# Altium PCB PadaukPMS171BTestBoard.PcbDoc
Units mm, origin at the board's own origin, x right, y up, seen from the top; angles counter-clockwise.
Board outline 48.82 x 15.09 mm, 2 copper layers (Top Layer, Bottom Layer); 16 components, 13 nets, 50 pads, 0 vias.
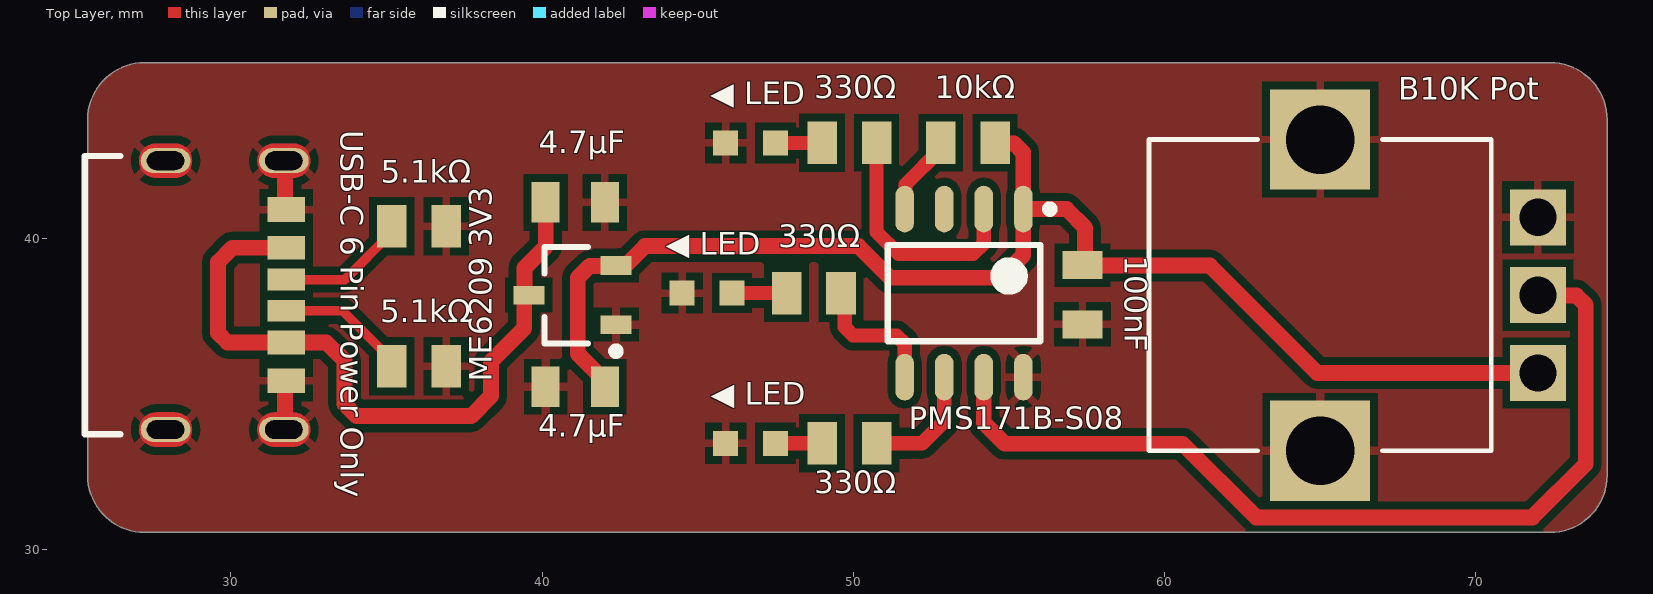
[diagram p0: Top Layer view]
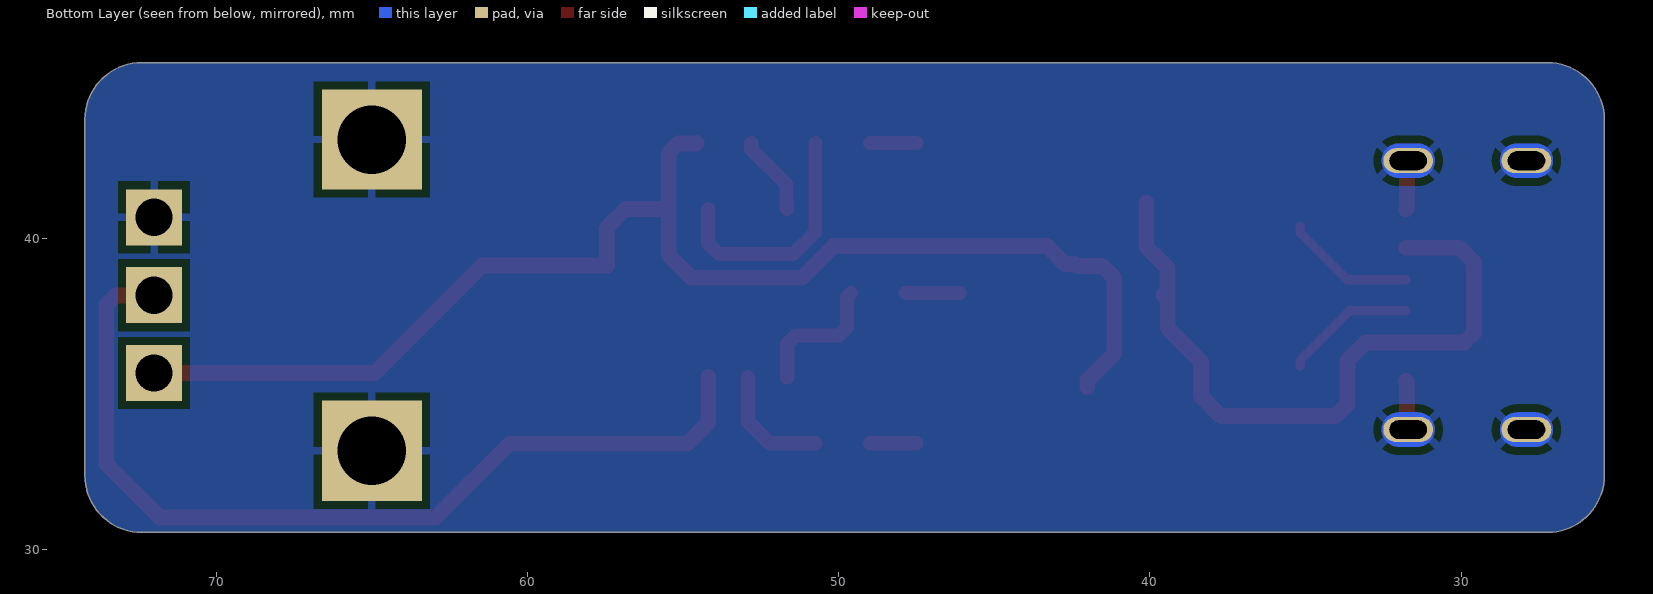
[diagram p1: Bottom Layer view, seen from below]
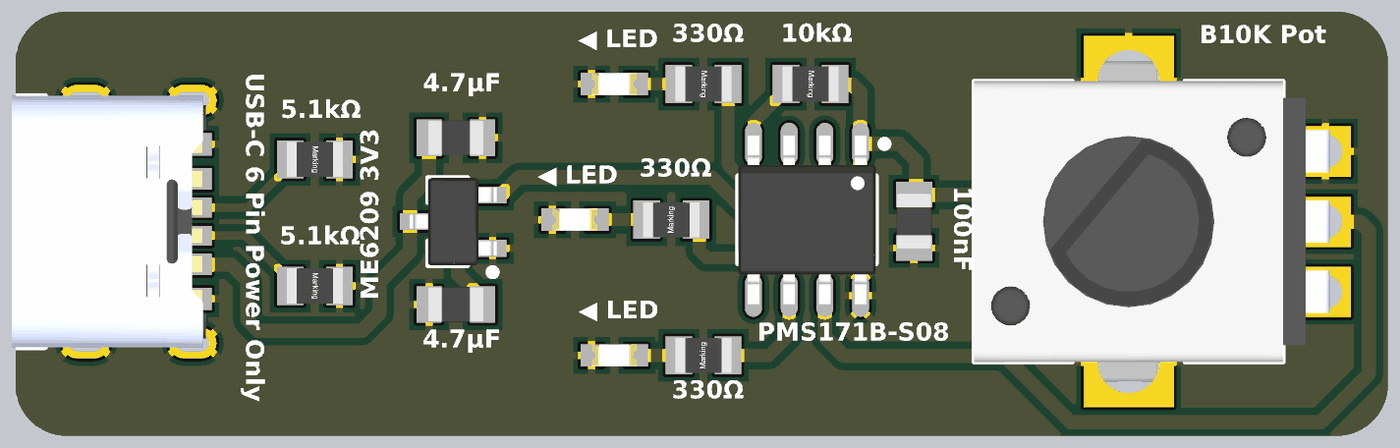
[diagram p2: 3D render of the assembled board from above, using the file's embedded part models]

## Layer stack, top to bottom
Top Solder: solder mask 0.0102, Solder Resist, Dk 3.5
Top Layer: signal copper 0.0356
Dielectric 1: dielectric 0.32, FR-4, Dk 4.8
Bottom Layer: signal copper 0.0356
Bottom Solder: solder mask 0.0102, Solder Resist, Dk 3.5

## Board outline
27.232,30.553 cw(c27.232,32.385) 25.4,32.385 25.4,43.815 cw(c27.232,43.815) 27.232,45.647 72.39,45.647 cw(c72.39,43.815) 74.222,43.815 74.222,32.385 cw(c72.39,32.385) 72.39,30.553

## Design rules (kind name [scope] priority, off if disabled: settings)
Clearance [All] p1: gap=0.254 ignorepadtopadclearanceinfootprint=FALSE
Height [All] p1: minheight=0 maxheight=50.8 prefheight=12.7
PolygonConnect [All] p1: connectstyle=Relief reliefconductorwidth=0.254 reliefentries=4 polygonreliefangle="90 Angle" conductorbypadedge=TRUE mindistance=0.381 enablemindistance=FALSE airgapwidth=0.254
RoutingVias [All] p1: holewidth=0.25 width=0.4 viastyle="Through Hole" minholewidth=0.25 minwidth=0.4 maxholewidth=0.25 maxwidth=0.4
SolderMaskExpansion [All] p1: expansion=0.102 istentingtop=FALSE
SupplyNets "Schematic Supply Nets_2" [InNet('3V3')] p1: voltage=0.000
SupplyNets "Schematic Supply Nets_1" [InNet('5V')] p2: voltage=0.000
SupplyNets "Schematic Supply Nets" [InNet('GND')] p3: voltage=0.000
Width [All] p1: maxlimit=0.508 minlimit=0.102 preferedwidth=0.305
29 further rules are at their usual default settings.

## Classes and differential pairs
component class PadaukPMS171BTestBoard: 4.7µF 5.1kΩ 10kΩ 100nF 330Ω "B10K Pot" "ME6209 3V3" PMS171B-S08 "USB-C 6 Pin Power Only" "◀ LED"

## Components (designator, comment, footprint, x,y, rotation, side; value= is the part's Value field where it differs from the comment)
4.7µF "4.7uF" WCAP-CSGP_0805_H=0.8mm_Reflow 41.065,35.229 r0 top (schematic designator C3)
4.7µF "4.7uF" WCAP-CSGP_0805_H=0.8mm_Reflow 41.065,41.157 r180 top (schematic designator C2)
5.1kΩ "5.1k" WRIS-PSMB_0805_H=0.22mm 36.046,40.389 r180 top (schematic designator R1)
5.1kΩ "5.1k" WRIS-PSMB_0805_H=0.22mm 36.046,35.888 r180 top (schematic designator R2)
10kΩ "10k" WRIS-PSMB_0805_H=0.22mm 53.683,43.068 r180 top (schematic designator R6)
100nF "100nF" WCAP-CSGP_0805_H=0.8mm_Reflow 57.364,38.189 r90 top (schematic designator C1)
330Ω "330Ω" WRIS-PSMB_0805_H=0.22mm 48.73,38.242 r0 top (schematic designator R5)
330Ω "330Ω" WRIS-PSMB_0805_H=0.22mm 49.873,33.416 r0 top (schematic designator R4)
330Ω "330Ω" WRIS-PSMB_0805_H=0.22mm 49.873,43.068 r180 top (schematic designator R3)
"B10K Pot" "RV09AF-40-20K-A10K" PTV09A-4025F-B103 64.998,38.177 r90 top (schematic designator P1)
"ME6209 3V3" "ME6209" SOT95P285X150-3N 40.973,38.177 r180 top (schematic designator U2)
PMS171B-S08 "PMS171B-S08" PMS171B-S08 53.556,38.242 r270 top (schematic designator U1)
"USB-C 6 Pin Power Only" "USB 6Pin Female Power Only" GCT_USB4125-GF-A_REVA2 28.702,38.177 r270 top (schematic designator J1)
"◀ LED" "Yellow, 2V" WL-SMCW_0603_H=0.7mm 45.301,38.242 r0 top (schematic designator D2)
"◀ LED" "Yellow, 2V" WL-SMCW_0603_H=0.7mm 46.698,33.416 r0 top (schematic designator D1)
"◀ LED" "Yellow, 2V" WL-SMCW_0603_H=0.7mm 46.698,43.068 r0 top (schematic designator D3)

## Footprints (in the part's own frame and the unit in brackets; to place one, negate y for a bottom-side part, rotate by r counter-clockwise, add the part's x,y. Pads: shape width x height; smd on the part's side, far side on the other; paste and mask are expansions set on the pad)
GCT_USB4125-GF-A_REVA2 [mm]
  rect 0.7x1.2 smd: A5(-0.5,3.08) B5(0.5,3.08)
  rect 0.76x1.2 smd: A9(1.52,3.08) B9(-1.52,3.08)
  rect 0.8x1.2 smd: A12(2.75,3.08) B12(-2.75,3.08)
  oval 0.8x1.6 hole 0.6 slot 1.2 at 90 deg mask+0: S1(-4.32,3) S2(4.32,3) S3(-4.32,-0.8) S4(4.32,-0.8)
  Top Layer region: 4.349,3.849 4.377,3.847 4.406,3.843 4.434,3.838 4.462,3.831 4.49,3.823 4.517,3.813 4.544,3.802 4.57,3.79 4.595,3.776 4.62,3.761 4.643,3.745 4.666,3.727 4.688,3.709 4.709,3.689 4.729,3.668 4.747,3.646 4.765,3.623 4.781,3.6 4.796,3.575 4.81,3.55 4.822,3.524 4.833,3.497 4.843,3.47 4.851,3.442 4.858,3.414 4.863,3.386 4.867,3.357 4.869,3.329 4.87,3.3 4.87,2.7 4.869,2.671 4.867,2.643 4.863,2.614 4.858,2.586 4.851,2.558 4.843,2.53 4.833,2.503 4.822,2.476 4.81,2.45 4.796,2.425 4.781,2.4 4.765,2.377 4.747,2.354 4.729,2.332 4.709,2.311 4.688,2.291 4.666,2.273 4.643,2.255 4.62,2.239 4.595,2.224 4.57,2.21 4.544,2.198 4.517,2.187 4.49,2.177 4.462,2.169 4.434,2.162 4.406,2.157 4.377,2.153 4.349,2.151 4.32,2.15 4.291,2.151 4.263,2.153 4.234,2.157 4.206,2.162 4.178,2.169 4.15,2.177 4.123,2.187 4.096,2.198 4.07,2.21 4.045,2.224 4.02,2.239 3.997,2.255 3.974,2.273 3.952,2.291 3.931,2.311 3.911,2.332 3.893,2.354 3.875,2.377 3.859,2.4 3.844,2.425 3.83,2.45 3.818,2.476 3.807,2.503 3.797,2.53 3.789,2.558 3.782,2.586 3.777,2.614 3.773,2.643 3.771,2.671 3.77,2.7 3.77,3.3 3.771,3.329 3.773,3.357 3.777,3.386 3.782,3.414 3.789,3.442 3.797,3.47 3.807,3.497 3.818,3.524 3.83,3.55 3.844,3.575 3.859,3.6 3.875,3.623 3.893,3.646 3.911,3.668 3.931,3.689 3.952,3.709 3.974,3.727 3.997,3.745 4.02,3.761 4.045,3.776 4.07,3.79 4.096,3.802 4.123,3.813 4.15,3.823 4.178,3.831 4.206,3.838 4.234,3.843 4.263,3.847 4.291,3.849 4.32,3.85
  Top Layer region: -4.291,3.849 -4.263,3.847 -4.234,3.843 -4.206,3.838 -4.178,3.831 -4.15,3.823 -4.123,3.813 -4.096,3.802 -4.07,3.79 -4.045,3.776 -4.02,3.761 -3.997,3.745 -3.974,3.727 -3.952,3.709 -3.931,3.689 -3.911,3.668 -3.893,3.646 -3.875,3.623 -3.859,3.6 -3.844,3.575 -3.83,3.55 -3.818,3.524 -3.807,3.497 -3.797,3.47 -3.789,3.442 -3.782,3.414 -3.777,3.386 -3.773,3.357 -3.771,3.329 -3.77,3.3 -3.77,2.7 -3.771,2.671 -3.773,2.643 -3.777,2.614 -3.782,2.586 -3.789,2.558 -3.797,2.53 -3.807,2.503 -3.818,2.476 -3.83,2.45 -3.844,2.425 -3.859,2.4 -3.875,2.377 -3.893,2.354 -3.911,2.332 -3.931,2.311 -3.952,2.291 -3.974,2.273 -3.997,2.255 -4.02,2.239 -4.045,2.224 -4.07,2.21 -4.096,2.198 -4.123,2.187 -4.15,2.177 -4.178,2.169 -4.206,2.162 -4.234,2.157 -4.263,2.153 -4.291,2.151 -4.32,2.15 -4.349,2.151 -4.377,2.153 -4.406,2.157 -4.434,2.162 -4.462,2.169 -4.49,2.177 -4.517,2.187 -4.544,2.198 -4.57,2.21 -4.595,2.224 -4.62,2.239 -4.643,2.255 -4.666,2.273 -4.688,2.291 -4.709,2.311 -4.729,2.332 -4.747,2.354 -4.765,2.377 -4.781,2.4 -4.796,2.425 -4.81,2.45 -4.822,2.476 -4.833,2.503 -4.843,2.53 -4.851,2.558 -4.858,2.586 -4.863,2.614 -4.867,2.643 -4.869,2.671 -4.87,2.7 -4.87,3.3 -4.869,3.329 -4.867,3.357 -4.863,3.386 -4.858,3.414 -4.851,3.442 -4.843,3.47 -4.833,3.497 -4.822,3.524 -4.81,3.55 -4.796,3.575 -4.781,3.6 -4.765,3.623 -4.747,3.646 -4.729,3.668 -4.709,3.689 -4.688,3.709 -4.666,3.727 -4.643,3.745 -4.62,3.761 -4.595,3.776 -4.57,3.79 -4.544,3.802 -4.517,3.813 -4.49,3.823 -4.462,3.831 -4.434,3.838 -4.406,3.843 -4.377,3.847 -4.349,3.849 -4.32,3.85
  Top Layer region: 4.349,0.049 4.377,0.047 4.406,0.043 4.434,0.038 4.462,0.031 4.49,0.023 4.517,0.013 4.544,0.002 4.57,-0.01 4.595,-0.024 4.62,-0.039 4.643,-0.055 4.666,-0.073 4.688,-0.091 4.709,-0.111 4.729,-0.132 4.747,-0.154 4.765,-0.177 4.781,-0.2 4.796,-0.225 4.81,-0.25 4.822,-0.276 4.833,-0.303 4.843,-0.33 4.851,-0.358 4.858,-0.386 4.863,-0.414 4.867,-0.443 4.869,-0.471 4.87,-0.5 4.87,-1.1 4.869,-1.129 4.867,-1.157 4.863,-1.186 4.858,-1.214 4.851,-1.242 4.843,-1.27 4.833,-1.297 4.822,-1.324 4.81,-1.35 4.796,-1.375 4.781,-1.4 4.765,-1.423 4.747,-1.446 4.729,-1.468 4.709,-1.489 4.688,-1.509 4.666,-1.527 4.643,-1.545 4.62,-1.561 4.595,-1.576 4.57,-1.59 4.544,-1.602 4.517,-1.613 4.49,-1.623 4.462,-1.631 4.434,-1.638 4.406,-1.643 4.377,-1.647 4.349,-1.649 4.32,-1.65 4.291,-1.649 4.263,-1.647 4.234,-1.643 4.206,-1.638 4.178,-1.631 4.15,-1.623 4.123,-1.613 4.096,-1.602 4.07,-1.59 4.045,-1.576 4.02,-1.561 3.997,-1.545 3.974,-1.527 3.952,-1.509 3.931,-1.489 3.911,-1.468 3.893,-1.446 3.875,-1.423 3.859,-1.4 3.844,-1.375 3.83,-1.35 3.818,-1.324 3.807,-1.297 3.797,-1.27 3.789,-1.242 3.782,-1.214 3.777,-1.186 3.773,-1.157 3.771,-1.129 3.77,-1.1 3.77,-0.5 3.771,-0.471 3.773,-0.443 3.777,-0.414 3.782,-0.386 3.789,-0.358 3.797,-0.33 3.807,-0.303 3.818,-0.276 3.83,-0.25 3.844,-0.225 3.859,-0.2 3.875,-0.177 3.893,-0.154 3.911,-0.132 3.931,-0.111 3.952,-0.091 3.974,-0.073 3.997,-0.055 4.02,-0.039 4.045,-0.024 4.07,-0.01 4.096,0.002 4.123,0.013 4.15,0.023 4.178,0.031 4.206,0.038 4.234,0.043 4.263,0.047 4.291,0.049 4.32,0.05
  Top Layer region: -4.291,0.049 -4.263,0.047 -4.234,0.043 -4.206,0.038 -4.178,0.031 -4.15,0.023 -4.123,0.013 -4.096,0.002 -4.07,-0.01 -4.045,-0.024 -4.02,-0.039 -3.997,-0.055 -3.974,-0.073 -3.952,-0.091 -3.931,-0.111 -3.911,-0.132 -3.893,-0.154 -3.875,-0.177 -3.859,-0.2 -3.844,-0.225 -3.83,-0.25 -3.818,-0.276 -3.807,-0.303 -3.797,-0.33 -3.789,-0.358 -3.782,-0.386 -3.777,-0.414 -3.773,-0.443 -3.771,-0.471 -3.77,-0.5 -3.77,-1.1 -3.771,-1.129 -3.773,-1.157 -3.777,-1.186 -3.782,-1.214 -3.789,-1.242 -3.797,-1.27 -3.807,-1.297 -3.818,-1.324 -3.83,-1.35 -3.844,-1.375 -3.859,-1.4 -3.875,-1.423 -3.893,-1.446 -3.911,-1.468 -3.931,-1.489 -3.952,-1.509 -3.974,-1.527 -3.997,-1.545 -4.02,-1.561 -4.045,-1.576 -4.07,-1.59 -4.096,-1.602 -4.123,-1.613 -4.15,-1.623 -4.178,-1.631 -4.206,-1.638 -4.234,-1.643 -4.263,-1.647 -4.291,-1.649 -4.32,-1.65 -4.349,-1.649 -4.377,-1.647 -4.406,-1.643 -4.434,-1.638 -4.462,-1.631 -4.49,-1.623 -4.517,-1.613 -4.544,-1.602 -4.57,-1.59 -4.595,-1.576 -4.62,-1.561 -4.643,-1.545 -4.666,-1.527 -4.688,-1.509 -4.709,-1.489 -4.729,-1.468 -4.747,-1.446 -4.765,-1.423 -4.781,-1.4 -4.796,-1.375 -4.81,-1.35 -4.822,-1.324 -4.833,-1.297 -4.843,-1.27 -4.851,-1.242 -4.858,-1.214 -4.863,-1.186 -4.867,-1.157 -4.869,-1.129 -4.87,-1.1 -4.87,-0.5 -4.869,-0.471 -4.867,-0.443 -4.863,-0.414 -4.858,-0.386 -4.851,-0.358 -4.843,-0.33 -4.833,-0.303 -4.822,-0.276 -4.81,-0.25 -4.796,-0.225 -4.781,-0.2 -4.765,-0.177 -4.747,-0.154 -4.729,-0.132 -4.709,-0.111 -4.688,-0.091 -4.666,-0.073 -4.643,-0.055 -4.62,-0.039 -4.595,-0.024 -4.57,-0.01 -4.544,0.002 -4.517,0.013 -4.49,0.023 -4.462,0.031 -4.434,0.038 -4.406,0.043 -4.377,0.047 -4.349,0.049 -4.32,0.05
  Bottom Layer region: 4.349,3.849 4.377,3.847 4.406,3.843 4.434,3.838 4.462,3.831 4.49,3.823 4.517,3.813 4.544,3.802 4.57,3.79 4.595,3.776 4.62,3.761 4.643,3.745 4.666,3.727 4.688,3.709 4.709,3.689 4.729,3.668 4.747,3.646 4.765,3.623 4.781,3.6 4.796,3.575 4.81,3.55 4.822,3.524 4.833,3.497 4.843,3.47 4.851,3.442 4.858,3.414 4.863,3.386 4.867,3.357 4.869,3.329 4.87,3.3 4.87,2.7 4.869,2.671 4.867,2.643 4.863,2.614 4.858,2.586 4.851,2.558 4.843,2.53 4.833,2.503 4.822,2.476 4.81,2.45 4.796,2.425 4.781,2.4 4.765,2.377 4.747,2.354 4.729,2.332 4.709,2.311 4.688,2.291 4.666,2.273 4.643,2.255 4.62,2.239 4.595,2.224 4.57,2.21 4.544,2.198 4.517,2.187 4.49,2.177 4.462,2.169 4.434,2.162 4.406,2.157 4.377,2.153 4.349,2.151 4.32,2.15 4.291,2.151 4.263,2.153 4.234,2.157 4.206,2.162 4.178,2.169 4.15,2.177 4.123,2.187 4.096,2.198 4.07,2.21 4.045,2.224 4.02,2.239 3.997,2.255 3.974,2.273 3.952,2.291 3.931,2.311 3.911,2.332 3.893,2.354 3.875,2.377 3.859,2.4 3.844,2.425 3.83,2.45 3.818,2.476 3.807,2.503 3.797,2.53 3.789,2.558 3.782,2.586 3.777,2.614 3.773,2.643 3.771,2.671 3.77,2.7 3.77,3.3 3.771,3.329 3.773,3.357 3.777,3.386 3.782,3.414 3.789,3.442 3.797,3.47 3.807,3.497 3.818,3.524 3.83,3.55 3.844,3.575 3.859,3.6 3.875,3.623 3.893,3.646 3.911,3.668 3.931,3.689 3.952,3.709 3.974,3.727 3.997,3.745 4.02,3.761 4.045,3.776 4.07,3.79 4.096,3.802 4.123,3.813 4.15,3.823 4.178,3.831 4.206,3.838 4.234,3.843 4.263,3.847 4.291,3.849 4.32,3.85
  Bottom Layer region: -4.291,3.849 -4.263,3.847 -4.234,3.843 -4.206,3.838 -4.178,3.831 -4.15,3.823 -4.123,3.813 -4.096,3.802 -4.07,3.79 -4.045,3.776 -4.02,3.761 -3.997,3.745 -3.974,3.727 -3.952,3.709 -3.931,3.689 -3.911,3.668 -3.893,3.646 -3.875,3.623 -3.859,3.6 -3.844,3.575 -3.83,3.55 -3.818,3.524 -3.807,3.497 -3.797,3.47 -3.789,3.442 -3.782,3.414 -3.777,3.386 -3.773,3.357 -3.771,3.329 -3.77,3.3 -3.77,2.7 -3.771,2.671 -3.773,2.643 -3.777,2.614 -3.782,2.586 -3.789,2.558 -3.797,2.53 -3.807,2.503 -3.818,2.476 -3.83,2.45 -3.844,2.425 -3.859,2.4 -3.875,2.377 -3.893,2.354 -3.911,2.332 -3.931,2.311 -3.952,2.291 -3.974,2.273 -3.997,2.255 -4.02,2.239 -4.045,2.224 -4.07,2.21 -4.096,2.198 -4.123,2.187 -4.15,2.177 -4.178,2.169 -4.206,2.162 -4.234,2.157 -4.263,2.153 -4.291,2.151 -4.32,2.15 -4.349,2.151 -4.377,2.153 -4.406,2.157 -4.434,2.162 -4.462,2.169 -4.49,2.177 -4.517,2.187 -4.544,2.198 -4.57,2.21 -4.595,2.224 -4.62,2.239 -4.643,2.255 -4.666,2.273 -4.688,2.291 -4.709,2.311 -4.729,2.332 -4.747,2.354 -4.765,2.377 -4.781,2.4 -4.796,2.425 -4.81,2.45 -4.822,2.476 -4.833,2.503 -4.843,2.53 -4.851,2.558 -4.858,2.586 -4.863,2.614 -4.867,2.643 -4.869,2.671 -4.87,2.7 -4.87,3.3 -4.869,3.329 -4.867,3.357 -4.863,3.386 -4.858,3.414 -4.851,3.442 -4.843,3.47 -4.833,3.497 -4.822,3.524 -4.81,3.55 -4.796,3.575 -4.781,3.6 -4.765,3.623 -4.747,3.646 -4.729,3.668 -4.709,3.689 -4.688,3.709 -4.666,3.727 -4.643,3.745 -4.62,3.761 -4.595,3.776 -4.57,3.79 -4.544,3.802 -4.517,3.813 -4.49,3.823 -4.462,3.831 -4.434,3.838 -4.406,3.843 -4.377,3.847 -4.349,3.849 -4.32,3.85
  Bottom Layer region: 4.349,0.049 4.377,0.047 4.406,0.043 4.434,0.038 4.462,0.031 4.49,0.023 4.517,0.013 4.544,0.002 4.57,-0.01 4.595,-0.024 4.62,-0.039 4.643,-0.055 4.666,-0.073 4.688,-0.091 4.709,-0.111 4.729,-0.132 4.747,-0.154 4.765,-0.177 4.781,-0.2 4.796,-0.225 4.81,-0.25 4.822,-0.276 4.833,-0.303 4.843,-0.33 4.851,-0.358 4.858,-0.386 4.863,-0.414 4.867,-0.443 4.869,-0.471 4.87,-0.5 4.87,-1.1 4.869,-1.129 4.867,-1.157 4.863,-1.186 4.858,-1.214 4.851,-1.242 4.843,-1.27 4.833,-1.297 4.822,-1.324 4.81,-1.35 4.796,-1.375 4.781,-1.4 4.765,-1.423 4.747,-1.446 4.729,-1.468 4.709,-1.489 4.688,-1.509 4.666,-1.527 4.643,-1.545 4.62,-1.561 4.595,-1.576 4.57,-1.59 4.544,-1.602 4.517,-1.613 4.49,-1.623 4.462,-1.631 4.434,-1.638 4.406,-1.643 4.377,-1.647 4.349,-1.649 4.32,-1.65 4.291,-1.649 4.263,-1.647 4.234,-1.643 4.206,-1.638 4.178,-1.631 4.15,-1.623 4.123,-1.613 4.096,-1.602 4.07,-1.59 4.045,-1.576 4.02,-1.561 3.997,-1.545 3.974,-1.527 3.952,-1.509 3.931,-1.489 3.911,-1.468 3.893,-1.446 3.875,-1.423 3.859,-1.4 3.844,-1.375 3.83,-1.35 3.818,-1.324 3.807,-1.297 3.797,-1.27 3.789,-1.242 3.782,-1.214 3.777,-1.186 3.773,-1.157 3.771,-1.129 3.77,-1.1 3.77,-0.5 3.771,-0.471 3.773,-0.443 3.777,-0.414 3.782,-0.386 3.789,-0.358 3.797,-0.33 3.807,-0.303 3.818,-0.276 3.83,-0.25 3.844,-0.225 3.859,-0.2 3.875,-0.177 3.893,-0.154 3.911,-0.132 3.931,-0.111 3.952,-0.091 3.974,-0.073 3.997,-0.055 4.02,-0.039 4.045,-0.024 4.07,-0.01 4.096,0.002 4.123,0.013 4.15,0.023 4.178,0.031 4.206,0.038 4.234,0.043 4.263,0.047 4.291,0.049 4.32,0.05
  Bottom Layer region: -4.291,0.049 -4.263,0.047 -4.234,0.043 -4.206,0.038 -4.178,0.031 -4.15,0.023 -4.123,0.013 -4.096,0.002 -4.07,-0.01 -4.045,-0.024 -4.02,-0.039 -3.997,-0.055 -3.974,-0.073 -3.952,-0.091 -3.931,-0.111 -3.911,-0.132 -3.893,-0.154 -3.875,-0.177 -3.859,-0.2 -3.844,-0.225 -3.83,-0.25 -3.818,-0.276 -3.807,-0.303 -3.797,-0.33 -3.789,-0.358 -3.782,-0.386 -3.777,-0.414 -3.773,-0.443 -3.771,-0.471 -3.77,-0.5 -3.77,-1.1 -3.771,-1.129 -3.773,-1.157 -3.777,-1.186 -3.782,-1.214 -3.789,-1.242 -3.797,-1.27 -3.807,-1.297 -3.818,-1.324 -3.83,-1.35 -3.844,-1.375 -3.859,-1.4 -3.875,-1.423 -3.893,-1.446 -3.911,-1.468 -3.931,-1.489 -3.952,-1.509 -3.974,-1.527 -3.997,-1.545 -4.02,-1.561 -4.045,-1.576 -4.07,-1.59 -4.096,-1.602 -4.123,-1.613 -4.15,-1.623 -4.178,-1.631 -4.206,-1.638 -4.234,-1.643 -4.263,-1.647 -4.291,-1.649 -4.32,-1.65 -4.349,-1.649 -4.377,-1.647 -4.406,-1.643 -4.434,-1.638 -4.462,-1.631 -4.49,-1.623 -4.517,-1.613 -4.544,-1.602 -4.57,-1.59 -4.595,-1.576 -4.62,-1.561 -4.643,-1.545 -4.666,-1.527 -4.688,-1.509 -4.709,-1.489 -4.729,-1.468 -4.747,-1.446 -4.765,-1.423 -4.781,-1.4 -4.796,-1.375 -4.81,-1.35 -4.822,-1.324 -4.833,-1.297 -4.843,-1.27 -4.851,-1.242 -4.858,-1.214 -4.863,-1.186 -4.867,-1.157 -4.869,-1.129 -4.87,-1.1 -4.87,-0.5 -4.869,-0.471 -4.867,-0.443 -4.863,-0.414 -4.858,-0.386 -4.851,-0.358 -4.843,-0.33 -4.833,-0.303 -4.822,-0.276 -4.81,-0.25 -4.796,-0.225 -4.781,-0.2 -4.765,-0.177 -4.747,-0.154 -4.729,-0.132 -4.709,-0.111 -4.688,-0.091 -4.666,-0.073 -4.643,-0.055 -4.62,-0.039 -4.595,-0.024 -4.57,-0.01 -4.544,0.002 -4.517,0.013 -4.49,0.023 -4.462,0.031 -4.434,0.038 -4.406,0.043 -4.377,0.047 -4.349,0.049 -4.32,0.05
  silkscreen extent -4.47,-3.4 4.47,-2.25, body extent -4.47,-3.43 4.47,3.47, height 3.26
PMS171B-S08 [mm] "SOP, 8-Leads, Body 4,90x3,90mm, Pitch 1,27mm, IPC Medium Density"
  oval 1.5x0.6 smd: 1(-2.7,1.905) 2(-2.7,0.635) 3(-2.7,-0.635) 4(-2.7,-1.905) 5(2.7,-1.905) 6(2.7,-0.635) 7(2.7,0.635) 8(2.7,1.905)
  silkscreen extent -2.82,-2.45 1.55,2.88, body extent -3,-2.45 3,2.45, height 1.75
PTV09A-4025F-B103 [mm]
  rect 1.8x1.8 / inner round 1.8 / far side rect 1.8x1.8 hole 1.2: 1(-2.5,-7) 2(0,-7) 3(2.5,-7)
  rect 3.216x3.216 / inner round 3.216 / far side rect 3.216x3.216 hole 2.2: S1(-5,0) S2(5,0)
  silkscreen extent -5,-5.5 5,5.5, body extent -5.7,-7.15 5.7,5.5, height 25.5
SOT95P285X150-3N [mm] "SOT23, 3-Leads, Body 2,95x2,85mm, Pitch 0,95mm, IPC Medium Density"
  rect 1x0.6 smd: 1(-1.4,0.95) 2(-1.4,-0.95) 3(1.4,0)
  silkscreen extent -1.53,-1.55 0.9,1.92, body extent -1.55,-1.55 1.55,1.55, height 1.5
WCAP-CSGP_0805_H=0.8mm_Reflow [mm] "Ceramic Capacitors, body 2x1.25mm"
  rect 0.9x1.3 smd: 1(-0.95,0) 2(0.95,0)
  body extent -1,-0.62 1,0.63, height 0.8
WL-SMCW_0603_H=0.7mm [mm] "SMD Mono-color Chip LED, body 1.6x0.8mm"
  rect 0.8x0.8 smd: 1(-0.8,0) 2(0.8,0)
  body extent -0.8,-0.4 0.8,0.4, height 0.7
WRIS-PSMB_0805_H=0.22mm [mm] "Metal Plate Resistor, SMT, body size 2x1.25mm"
  rect 0.95x1.36 smd: 1(-0.875,0) 2(0.875,0)
  body extent -1,-0.62 1,0.63, height 0.22

## Part data
4.7µF 4.7µF 100nF: library part 885012007021, "WCAP-CSGP General Purpose Ceramic Capacitors, size 0805, 1nF, +/-5%, 16VDC", Capacitance=1nF, Capacitance Tolerance=+/-5%, Isolation Resistance=>=10GOhm, Operating Temperature="-55 to +125degC", Rated Voltage=16VDC, Ceramic Type=NP0, ComponentLink1Description=Manufacturer, ComponentLink1URL=http://www.we-online.de, ComponentLink2Description=Datasheet, ComponentLink2URL=https://katalog.we-online.com/pbs/datasheet/885012007021.pdf, Dissipation Factor=Q>=1000, Height="0.8mm +/-0.10mm", Mounting Technology=SMD, Packaging="Tape and Reel", Part Number=885012007021, Published Date="August 2019", Publisher="Wurth Elektronik", Size=0805, Technical Reference=NP00805102J016DFCT10000
5.1kΩ 5.1kΩ 10kΩ 330Ω 330Ω 330Ω: library part 580060720008, "WRIS-PSMB Metal Plate Resistors, size 0805, 10mOhm, +/-1%, 0.5W", Operating Temperature="-55 to +155degC", Rated Current=7.07A, Rated Power=0.5W, Resistance=10mOhm, Resistance Tolerance=+/-1%, Temperature Coefficient of Resistance=+/-100ppm/degC, ComponentLink1Description=Manufacturer, ComponentLink1URL=http://www.we-online.de, ComponentLink2Description=Datasheet, ComponentLink2URL=https://katalog.we-online.com/pbs/datasheet/580060720008.pdf, Height=0.22mm, Length=2mm, Mounting Technology=SMT, Packaging="Tape and Reel", Part Number=580060720008, Published Date="September 2019", Publisher="Wurth Elektronik", Size=0805, Technical Reference=MB0805R010F102KAATP0000, Width=1.25mm
"B10K Pot": "PC Mount Black Shaft Potentiometers Audio 9mm 10K", Package=None, Check_prices=https://www.snapeda.com/parts/RV09AF-40-20K-A10K/Alpha/view-part/?ref=eda, MF="Alpha Taiwan", MP=RV09AF-40-20K-A10K, SnapEDA_Link=https://www.snapeda.com/parts/RV09AF-40-20K-A10K/Alpha/view-part/?ref=snap
"USB-C 6 Pin Power Only": library part USB4125-GF-A_REVA2, Package=None, Availability=Unavailable, MP=USB4125-GF-A_REVA2, Price=None
"◀ LED" "◀ LED" "◀ LED": library part 150060YS75000, "WL-SMCW SMT Mono-color Chip LED Waterclear, size 0603, Yellow, 2V, 140deg", Emitting Color=Yellow, Forward Voltage typ.=2V, Operating Temperature="-40 to +85degC", Chip Technology=AlInGaP, ComponentLink1Description=Manufacturer, ComponentLink1URL=http://www.we-online.de, ComponentLink2Description=Datasheet, ComponentLink2URL=https://www.we-online.com/catalog/datasheet/150060YS75000.pdf, Dominant Wavelength typ.=590nm, Luminous Intensity typ.=120mcd, Mounting Technology=SMT, Packaging="Tape and Reel", Part Number=150060YS75000, Peak Wavelength typ.=595nm, Published Date="December 2019", Publisher="Wurth Elektronik", Size=0603, Viewing Angle=140deg

## Nets (pads, with @x,y where several pads share a name; then routed paths per layer and width w, separated by ;. In a path a pad name is that pad's centre, name@x,y a point inside that pad or via, vN(x,y) a via of type N, cw(c..) or ccw(c..) an arc to the next point about the centre after c; other vN are vias at no path point)
3V3: 4.7µF.2@42.015,35.229 10kΩ.1 100nF.2 "B10K Pot.1" "ME6209 3V3.2" PMS171B-S08.1 | length 43.1
  Top Layer w0.508: 4.7µF.2@42.015,35.229 42.015,35.429 41.148,36.296 41.148,38.735 41.529,39.116 42.363,39.116 42.419,39.173 42.729,39.173 43.307,39.751 50.165,39.751 51.181,38.735 54.737,38.735 55.461,39.459 PMS171B-S08.1 ; 10kΩ.1 54.573,43.053 55.163,43.053 55.461,42.755 PMS171B-S08.1 ; 71.998,35.677 64.907,35.677 61.457,39.127 57.447,39.127 57.447,40.343 56.848,40.942 PMS171B-S08.1
5V: 4.7µF.2@40.115,41.157 "ME6209 3V3.3" "USB-C 6 Pin Power Only.A9" "USB-C 6 Pin Power Only.B9" | length 22.8
  Top Layer w0.508: 31.782,39.697 30.045,39.697 29.591,39.243 29.591,36.957 29.891,36.657 31.782,36.657 33.066,36.657 33.655,36.068 33.655,34.671 34.036,34.29 37.719,34.29 38.354,34.925 38.354,36.041 39.428,37.115 39.428,38.131 39.474,38.177 39.573,38.177 39.485,38.177 39.439,38.223 39.439,39.058 40.115,39.734 4.7µF.2@40.115,41.157
GND: 4.7µF.1 5.1kΩ.1 100nF.1 "B10K Pot.3" "B10K Pot.S1" "B10K Pot.S2" "ME6209 3V3.1" "USB-C 6 Pin Power Only.A12" "USB-C 6 Pin Power Only.B12" "USB-C 6 Pin Power Only.S1" "USB-C 6 Pin Power Only.S2" "USB-C 6 Pin Power Only.S3" "USB-C 6 Pin Power Only.S4" "◀ LED.1" PMS171B-S08.8 | length 3.2
  Top Layer w0.508: 31.702,33.857 31.742,33.897 31.742,35.387 31.782,35.427 ; 31.702,42.497 31.742,42.457 31.742,40.967 31.782,40.927
LEDPA7: 330Ω.1@50.748,43.068 PMS171B-S08.2 | length 7.8
  Top Layer w0.457: 330Ω.1@50.748,43.068 50.748,40.21 51.461,39.497 53.848,39.497 54.191,39.84 PMS171B-S08.2
NetD1_2: 330Ω.1@48.998,33.416 "◀ LED.2"@47.498,33.416 | length 1.5
  Top Layer w0.457: 47.498,33.416 330Ω.1@48.998,33.416
NetD2_2: 330Ω.1@47.855,38.242 "◀ LED.2"@46.101,38.242 | length 1.8
  Top Layer w0.457: 46.101,38.242 330Ω.1@47.855,38.242
NetD3_2: 330Ω.2@48.998,43.068 "◀ LED.2"@47.498,43.068 | length 1.5
  Top Layer w0.457: 47.498,43.068 330Ω.2@48.998,43.068
NetJ1_A5: 5.1kΩ.2@35.171,40.389 "USB-C 6 Pin Power Only.A5" | length 4.2
  Top Layer w0.305: 31.782,38.677 33.663,38.677 35.171,40.184 5.1kΩ.2@35.171,40.389
NetJ1_B5: 5.1kΩ.2@35.171,35.888 "USB-C 6 Pin Power Only.B5" | length 4.3
  Top Layer w0.305: 31.782,37.677 33.587,37.677 35.171,36.093 5.1kΩ.2@35.171,35.888
NetR4_2: 330Ω.2@50.748,33.416 PMS171B-S08.6 | length 3.9
  Top Layer w0.457: 330Ω.2@50.748,33.416 52.212,33.416 52.921,34.125 PMS171B-S08.6
NetR5_2: 330Ω.2@49.605,38.242 PMS171B-S08.5 | length 4.4
  Top Layer w0.457: 330Ω.2@49.605,38.242 49.723,38.124 49.723,37.149 49.991,36.881 51.383,36.881 51.651,36.614 PMS171B-S08.5
NetR6_2: 10kΩ.2 PMS171B-S08.4 | length 2.6
  Top Layer w0.457: PMS171B-S08.4 51.678,40.969 51.678,41.733 52.808,42.863 10kΩ.2
POTADC: "B10K Pot.2" PMS171B-S08.7 | length 29.6
  Top Layer w0.508: PMS171B-S08.7 54.191,34.074 54.864,33.401 60.579,33.401 62.945,31.035 71.82,31.035 73.533,32.748 73.533,37.865 73.233,38.164 72.01,38.164 71.998,38.177
pads on no net: PMS171B-S08.3

## Polygon pours and split planes (outlines as drawn)
GND on Top Layer "NONET_L-01_P-001" (solid, pour order 1): 25.406,32.383 25.406,43.813 cw(c27.238,43.813) 27.238,45.645 72.396,45.645 cw(c72.396,43.813) 74.228,43.813 74.228,32.383 cw(c72.396,32.383) 72.396,30.551 27.238,30.551 cw(c27.238,32.383)
GND on Bottom Layer "NONET_L-01_P-001" (solid, pour order 0): 25.406,32.383 25.406,43.813 cw(c27.238,43.813) 27.238,45.645 72.396,45.645 cw(c72.396,43.813) 74.228,43.813 74.228,32.383 cw(c72.396,32.383) 72.396,30.551 27.238,30.551 cw(c27.238,32.383)

## Silkscreen, mask and mechanical layers (free items; w line width, h text height)
Mechanical 1:
  the board outline again, w0.254